# Altium PCB imu_cpu.PcbDoc
Units mil, origin at the board's own origin, x right, y up, seen from the top; angles counter-clockwise.
Board outline 2000 x 2000 mil, 2 copper layers (Top Layer, Bottom Layer); 86 components, 67 nets, 314 pads, 99 vias.
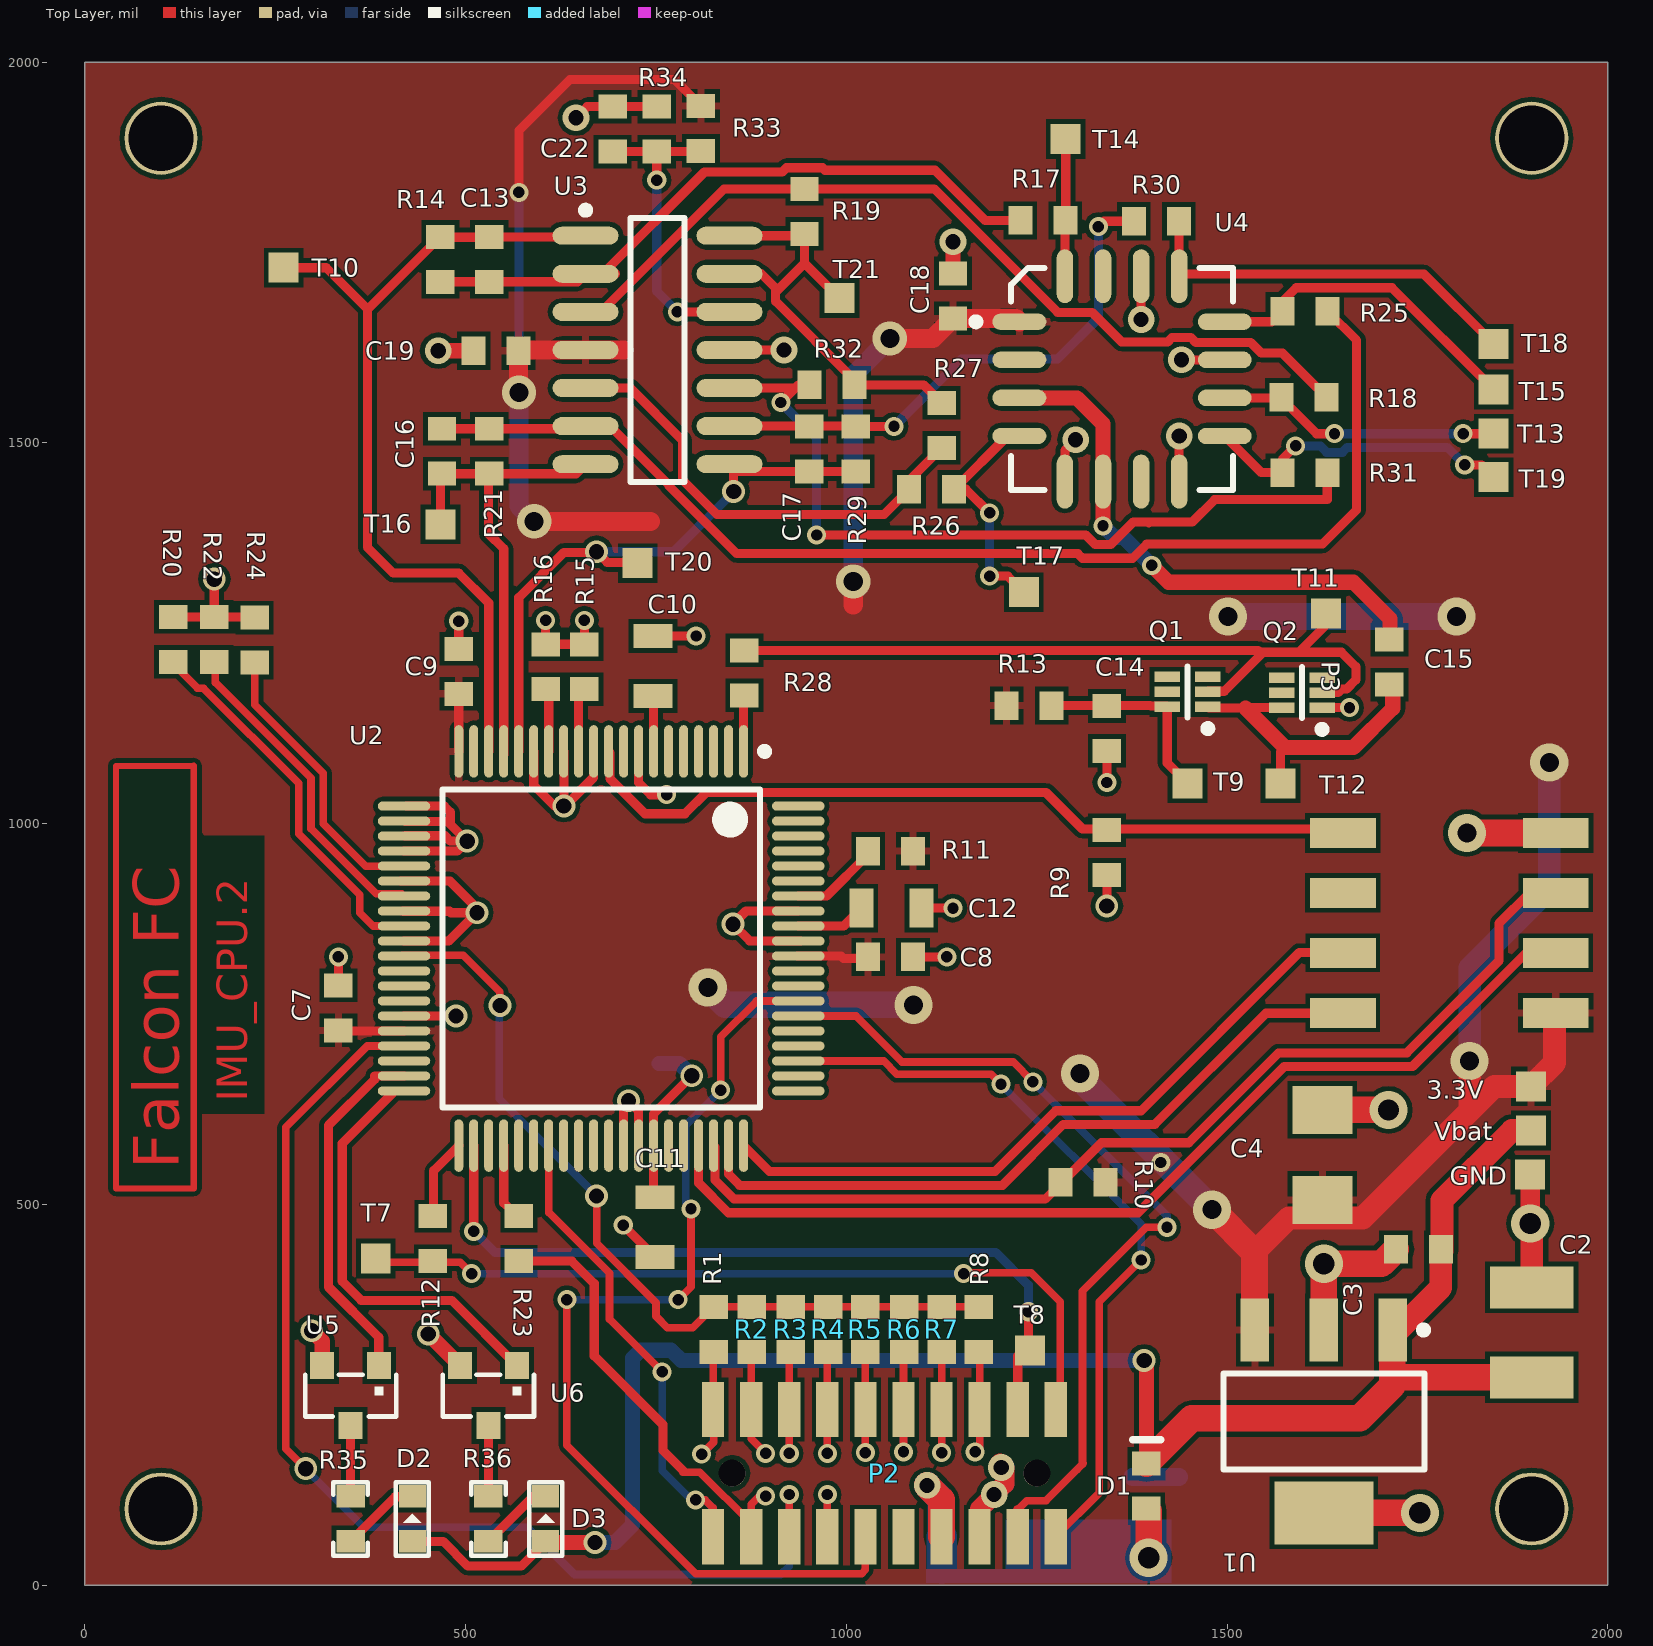
[diagram p0: Top Layer view]
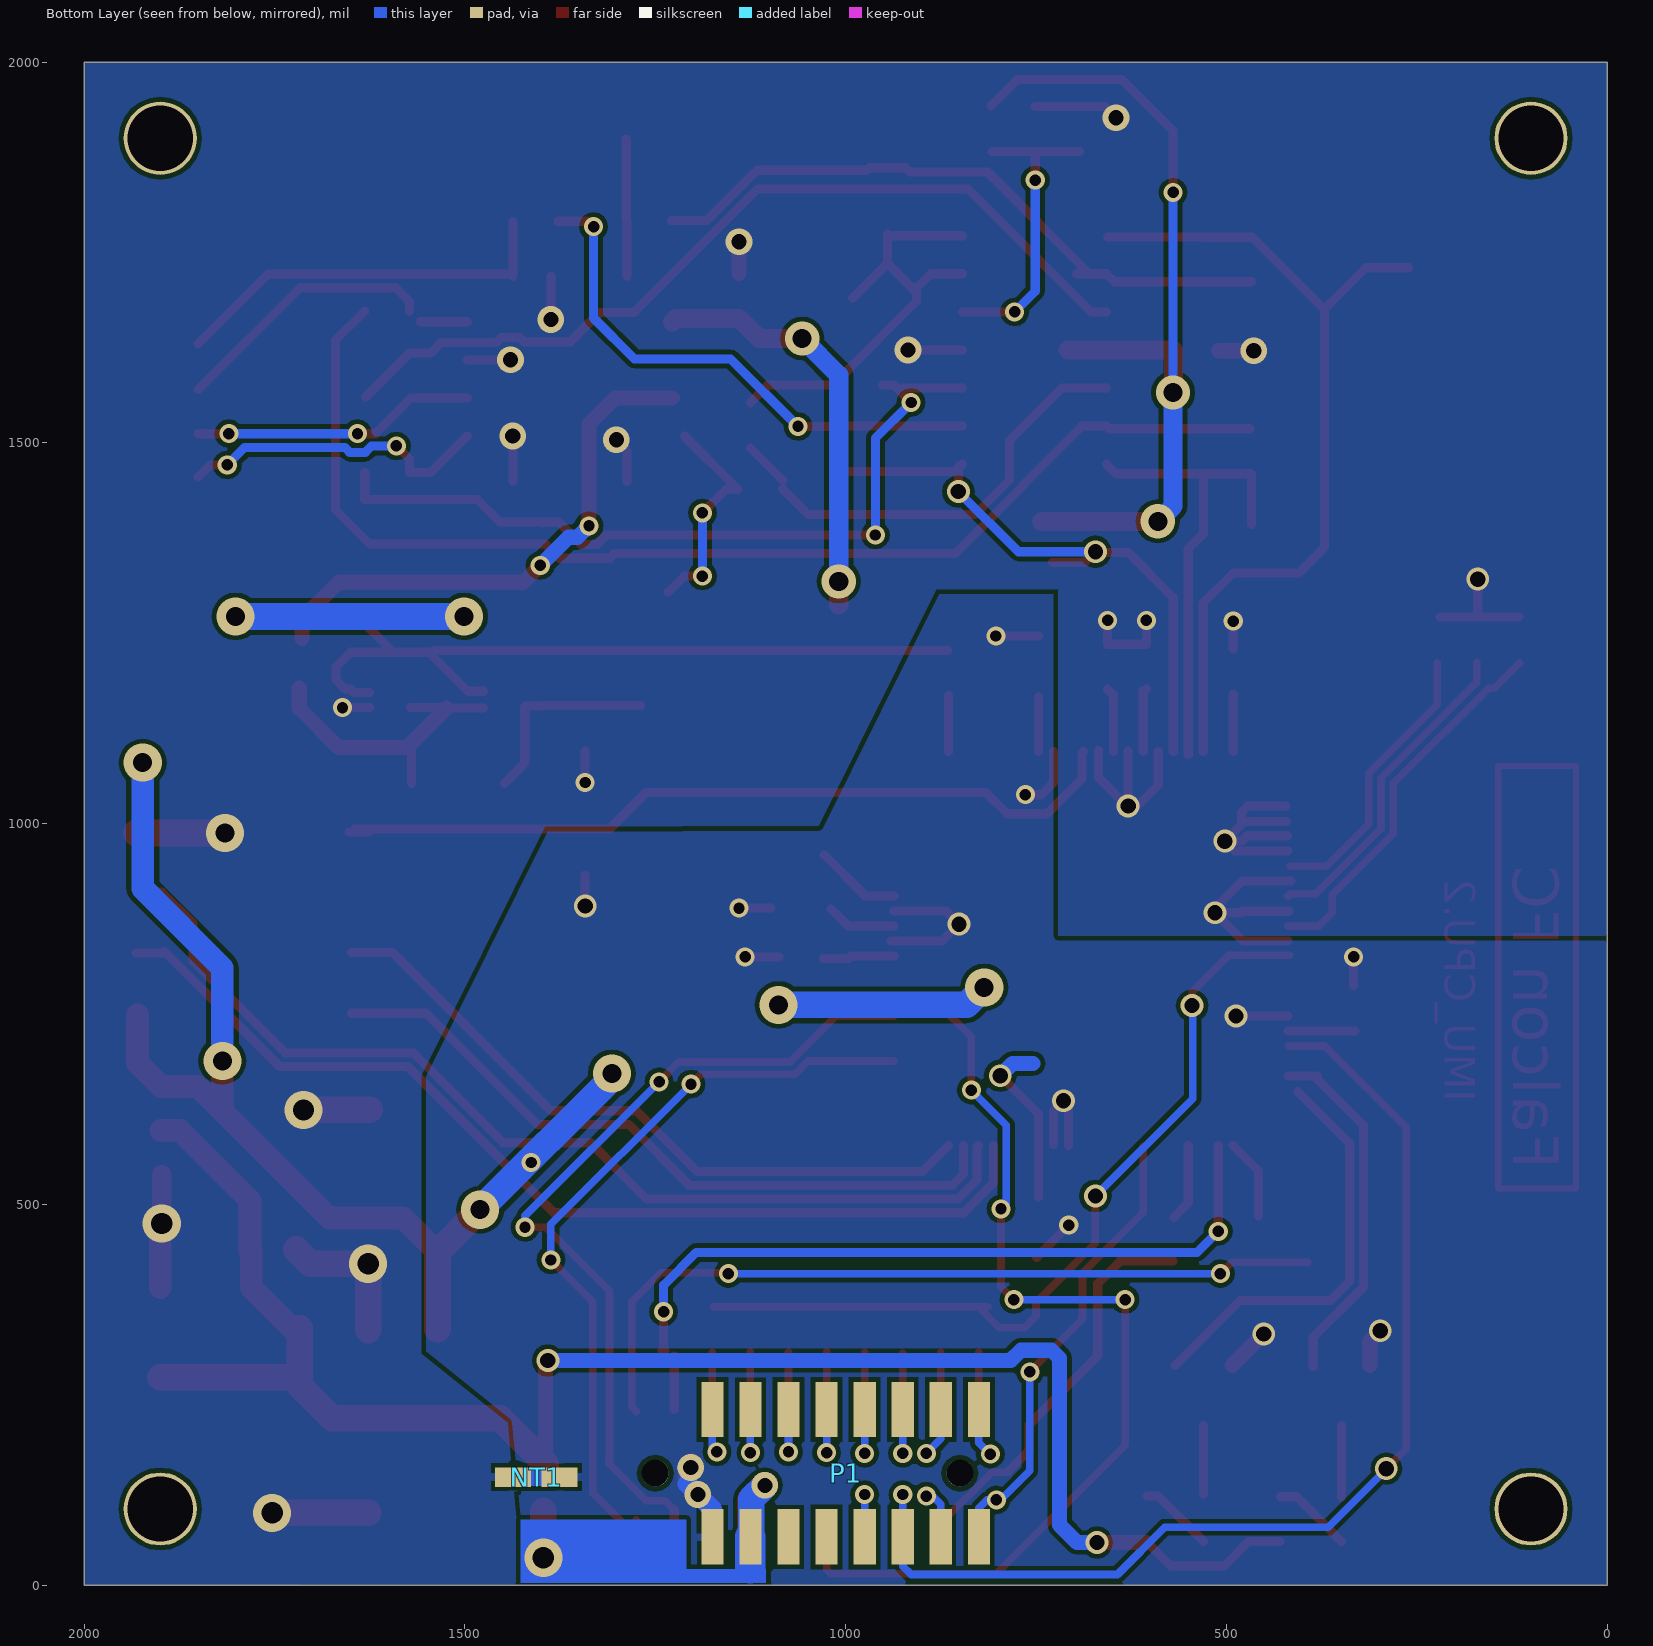
[diagram p1: Bottom Layer view, seen from below]

## Layer stack, top to bottom
Top Layer: signal copper 1.4
Dielectric: dielectric 12.6, FR-4, Dk 4.8
Bottom Layer: signal copper 1.4

## Board outline
0,0 2000,0 2000,2000 0,2000

## Design rules (kind name [scope] priority, off if disabled: settings)
Clearance [All] p1: gap=6
ComponentClearance [All] p1: gap=5 collisioncheckmode=3 verticalgap=1 showdistances=FALSE
DiffPairsRouting [All] p1: maxlimit=10 minlimit=6 mostfreqgap=6 maxuncoupledlength=500
HoleSize [All] p1: absolutevalues=TRUE maxlimit=100 minlimit=15 maxpercent=80.000 minpercent=20.000
HoleToHoleClearance [All] p1: gap=6 allowstackedmicrovias=TRUE
PlaneConnect [All] p1: planeconnectstyle=Direct reliefexpansion=20 reliefentries=4 reliefconductorwidth=25 reliefairgap=10
PolygonConnect PolygonConnect_1 [IsVia] p1: connectstyle=Direct reliefconductorwidth=10 reliefentries=4 polygonreliefangle="90 Angle"
PolygonConnect [All] p2: connectstyle=Relief reliefconductorwidth=10 reliefentries=4 polygonreliefangle="90 Angle"
RoomDefinition imu_cpu [InComponentClass('imu_cpu')] p1: confinementstyle=ConfineIn formatcopy=TRUE lockcomponents=FALSE outline 0,0 2000,0 2000,2000 0,2000
RoutingVias [All] p1: holewidth=15 width=25 viastyle="Through Hole" minholewidth=15 minwidth=25 maxholewidth=100 maxwidth=200
SilkToSilkClearance [All] p1: silktosilkclearance=1
SilkscreenOverComponentPads [All] p1: minsilkscreentomaskgap=1
SolderMaskExpansion SolderMaskExpansion_1 [IsVia] p1: expansion=-300
SolderMaskExpansion [All] p2: expansion=4
Width [All] p1: maxlimit=100 minlimit=6 preferedwidth=6
21 further rules are at their usual default settings.

## Components (designator, comment, footprint, x,y, rotation, side; value= is the part's Value field where it differs from the comment)
3.3V "TEST_PAD" TEST_PAD 1899,655 r0 top (schematic designator T5)
C2 "" "1210 (3225)" 1900,332 r90 top
C3 "" "0603 (1608)" 1751,441 r180 top
C4 "" "1206 (3216)" 1625,565 r90 top
C7 "Capacitor" "0603 (1608)" 333,758 r270 top
C8 "Capacitor" "0603 (1608)" 1058,825 r180 top
C9 "Capacitor" "0603 (1608)" 491,1200 r270 top
C10 "1.5uF" "0805 (2012)" 746,1207 r270 top
C11 "1.5uF" "0805 (2012)" 749,470 r90 top
C12 "1.5uF" "0805 (2012)" 1059,889 r180 top
C13 "1nF" "0603 (1608)" 531,1741 r90 top
C14 "1uF" "0603 (1608)" 1342,1125 r90 top
C15 "Capacitor" "0603 (1608)" 1713,1212 r270 top
C16 "1nF" "0603 (1608)" 469,1489 r270 top
C17 "1nF" "0603 (1608)" 951,1492 r270 top
C18 "Capacitor" "0603 (1608)" 1140,1693 r90 top
C19 "Capacitor" "0603 (1608)" 540,1621 r180 top
C22 "Capacitor" "0603 (1608)" 693,1912 r90 top
D1 "Diode" "0603(1608) diode - line on pin2" 1394,130 r90 top
D2 "LED" "LED 0603 (1608)" 430,87 r180 top
D3 "LED" "LED 0603 (1608)" 605,87 r180 top
GND "TEST_PAD" TEST_PAD 1898,539 r0 top
NT1 "Net Tie" NET_TIE 1406,142 r180 bottom net-tie
P1 "2x8smd0.5female" "Header, right hole" 1000,147 r0 bottom locked
P2 "MHDR2X10" S9013E-10-ND 1050,147 r0 top locked
P3 "Header 4X2" "right-angle female header 8-pin" 1652,751.52 r90 top
Q1 "MOSFET N CH" SOT563F 1448,1173 r180 top
Q2 "MOSFET P CH" SOT563F 1598,1172 r180 top
R1 "SS Jumper" "0603 (1608)" 826,336 r90 top
R2 "SS Jumper" "0603 (1608)" 876,336 r90 top
R3 "SS Jumper" "0603 (1608)" 927,336 r90 top
R4 "SS Jumper" "0603 (1608)" 976,336 r90 top
R5 "SS Jumper" "0603 (1608)" 1025,336 r90 top
R6 "SS Jumper" "0603 (1608)" 1076,336 r90 top
R7 "SS Jumper" "0603 (1608)" 1125,336 r90 top
R8 "SS Jumper" "0603 (1608)" 1174,336 r90 top
R9 "Res1" "0603 (1608)" 1342,962 r90 top
R10 "Res1" "0603 (1608)" 1311,529 r0 top
R11 "Res1" "0603 (1608)" 1058,964 r0 top
R12 "931 1%" "0603 (1608)" 457,455 r270 top
R13 "200" "0603 (1608)" 1240,1155 r0 top
R14 "499K 1%" "0603 (1608)" 467,1741 r90 top
R15 "1K" "0603 (1608)" 656,1206 r270 top
R16 "1K" "0603 (1608)" 605,1206 r270 top
R17 "Res1" "0603 (1608)" 1258,1792 r180 top
R18 "Res1" "0603 (1608)" 1601,1560 r0 top
R19 "499K 1%" "0603 (1608)" 945,1804 r90 top
R20 "1K" "0603 (1608)" 116,1242 r270 top
R21 "499K 1%" "0603 (1608)" 531,1489 r270 top
R22 "1K" "0603 (1608)" 170,1242 r270 top
R23 "931 1%" "0603 (1608)" 570,455 r270 top
R24 "1K" "0603 (1608)" 223,1241 r270 top
R25 "Res1" "0603 (1608)" 1602,1673 r0 top
R26 "Res1" "0603 (1608)" 1112,1439 r180 top
R27 "499K 1%" "0603 (1608)" 1125,1523 r270 top
R28 "931 1%" "0603 (1608)" 866,1198 r270 top
R29 "499K 1%" "0603 (1608)" 1012,1492 r270 top
R30 "Res1" "0603 (1608)" 1407,1791 r180 top
R31 "Res1" "0603 (1608)" 1602,1461 r0 top
R32 "499K 1%" "0603 (1608)" 981,1576 r180 top
R33 "Res1" "0603 (1608)" 809,1913 r90 top
R34 "Res1" "0603 (1608)" 751,1912 r270 top
R35 "Resistor" "0603 (1608) BRACKET" 349,87 r90 top
R36 "Resistor" "0603 (1608) BRACKET" 530,87 r90 top
T7 "" TEST_PAD 382,429 r0 top
T8 "" TEST_PAD 1241,308 r0 top
T9 "" TEST_PAD 1448,1053 r0 top
T10 "" TEST_PAD 261,1730 r90 top
T11 "" TEST_PAD 1630,1276 r90 top
T12 "" TEST_PAD 1570,1053 r90 top
T13 "" TEST_PAD 1850,1512 r90 top
T14 "" TEST_PAD 1288,1899 r90 top
T15 "" TEST_PAD 1850,1570 r90 top
T16 "" TEST_PAD 467,1393 r90 top
T17 "" TEST_PAD 1233,1304 r90 top
T18 "" TEST_PAD 1850,1630 r90 top
T19 "" TEST_PAD 1850,1455 r90 top
T20 "" TEST_PAD 726,1342 r90 top
T21 "" TEST_PAD 991,1690 r90 top
U1 "3.3V Linear 500mA Regulator" "SOT233 (Ti voltage reg)" 1627,215 r270 top
U2 "TMS320F28035" TS-PQFP-G80 678,836 r270 top
U3 "LMV324M" M14A_N 752,1622 r0 top
U4 "HMC1053" LCC-16 1362,1584 r0 top
U5 "RK7002B" SOT-23-RK7002B 349,249 r180 top
U6 "RK7002B" SOT-23-RK7002B 530,249 r180 top
Vbat "TEST_PAD" TEST_PAD 1899,597 r0 top (schematic designator T4)

## Footprints (in the part's own frame and the unit in brackets; to place one, negate y for a bottom-side part, rotate by r counter-clockwise, add the part's x,y. Pads: shape width x height; smd on the part's side, far side on the other; paste and mask are expansions set on the pad)
"0603 (1608)" [mm] "Chip 2-Leads 0603 (1608)"
  rect 0.8x0.95 smd mask+0: 1(-0.75,0) 2(0.75,0)
  body extent -0.77,-0.43 0.77,0.43, height 0.55
"0603 (1608) BRACKET" [mm] "Chip 2-Leads 0603 Bracket (1608)"
  rect 0.75x0.95 smd mask+0: 1(-0.75,0) 2(0.75,0)
  silkscreen extent -1.22,-0.58 1.22,0.58, body extent -0.77,-0.43 0.77,0.43, height 0.55
"0603(1608) diode - line on pin2" [mm]
  rect 0.8x0.95 smd mask+0: 1(-0.75,0) 2(0.75,0)
  silkscreen extent 1.55,-0.48 1.55,0.45, body extent -0.77,-0.43 0.77,0.43, height 0.55
"0805 (2012)" [mm] "Chip 2-Leads, IPC Medium Density (2012)"
  rect 0.8x1.3 smd mask+0: 1(-1,0) 2(1,0)
  body extent -1.05,-0.63 1.05,0.63, height 0.5
"1206 (3216)" [mm] "Chip 2-Leads 1206 Body 3.2x2.1mm (3216)"
  rect 1.6x2 smd mask+0.051: 1(-1.5,0) 2(1.5,0)
  body extent -1.6,-0.85 1.6,0.85, height 1.72
"1210 (3225)" [mm] "Chip  2-Leads 1210 Body 3.2x2.5mm Rectangular Silk Screen (3225)"
  rect 1.4x2.8 smd mask+0: 1(-1.5,0) 2(1.5,0)
  body extent -1.6,-1.24 1.6,1.26, height 2.5
"Header, right hole" [mm]
  rect 0.74x1.85 smd: 1(-4.445,2.125) 2(-4.445,-2.125) 3(-3.175,2.125) 4(-3.175,-2.125) 5(-1.905,2.125) 6(-1.905,-2.125) 7(-0.635,2.125) 8(-0.635,-2.125) 9(0.635,2.125) 10(0.635,-2.125) 11(1.905,2.125) 12(1.905,-2.125) 13(3.175,2.125) 14(3.175,-2.125) 15(4.445,2.125) 16(4.445,-2.125)
LCC-16 [mm] "HCM1053"
  oval 1.8x0.55 smd: 1(-3.425,1.905) 2(-3.425,0.635) 3(-3.425,-0.635) 4(-3.425,-1.905) 9(3.425,-1.905) 10(3.425,-0.635) 11(3.425,0.635) 12(3.425,1.905)
  oval 0.55x1.8 smd: 5(-1.905,-3.425) 6(-0.635,-3.425) 7(0.635,-3.425) 8(1.905,-3.425) 13(1.905,3.425) 14(0.635,3.425) 15(-0.635,3.425) 16(-1.905,3.425)
  silkscreen extent -5,-3.7 3.7,3.7, body extent -3.68,-3.69 3.69,3.68, height 2.8
"LED 0603 (1608)" [mm] "LED Chip 2-Leads 0603 Rectangular Silk Screen (1608)"
  rect 0.9x0.75 smd mask+0: 1(0,0.75) 2(0,-0.75)
  silkscreen extent -0.55,-1.22 0.55,1.22
M14A_N [mm] "SOIC, 14-Leads, Body 8.6x3.9mm, Pitch 1.27mm, IPC Medium Density"
  oval 2.2x0.6 smd: 1(-2.4,3.81) 2(-2.4,2.54) 3(-2.4,1.27) 4(-2.4,0) 5(-2.4,-1.27) 6(-2.4,-2.54) 7(-2.4,-3.81) 8(2.4,-3.81) 9(2.4,-2.54) 10(2.4,-1.27) 11(2.4,0) 12(2.4,1.27) 13(2.4,2.54) 14(2.4,3.81)
  silkscreen extent -2.52,-4.4 0.9,4.78, body extent -2,-4.38 2,4.38, height 1.75
NET_TIE [mm] "Used to connect 2 nets"
  rect 1.2x0.65 smd paste+0 mask-300: 1(-0.775,0)
  rect 1.2x0.65 smd: 2(0.775,0)
  Top Layer lines w0.6: 0.775,0 -0.775,0
"right-angle female header 8-pin" [mm] "Part No. 3M9279CT-ND ,Used for JTAG connection for IMU"
  rect 1x2.2 smd: 1(0,0) 2(2,0) 3(4,0) 4(6,0) 5(0,-7.1) 6(2,-7.1) 7(4,-7.1) 8(6,-7.1)
S9013E-10-ND [mm] "20-POS Header SMD"
  round 0.889 hole 0.9 unplated: 0(-5.08,0)
  round 0.889 hole 0.9 unplated mask+0: 0(5.08,0)
  rect 0.74x1.85 smd: 1(-5.715,2.125) 2(-5.715,-2.125) 3(-4.445,2.125) 4(-4.445,-2.125) 5(-3.175,2.125) 6(-3.175,-2.125) 7(-1.905,2.125) 8(-1.905,-2.125) 9(-0.635,2.125) 10(-0.635,-2.125) 11(0.635,2.125) 12(0.635,-2.125) 13(1.905,2.125) 14(1.905,-2.125) 15(3.175,2.125) 16(3.175,-2.125) 17(4.445,2.125) 18(4.445,-2.125) 19(5.715,2.125) 20(5.715,-2.125)
"SOT233 (Ti voltage reg)" [mm] "SOT223, 4-Leads, Body 6.7x7.3mm (max), Pitch 2.30mm, IPC Medium Density"
  rect 2.1x0.95 smd: 1(-3.05,2.3) 2(-3.05,0) 3(-3.05,-2.3)
  rect 2.1x3.3 smd: 4(3.05,0)
  silkscreen extent -3.17,-3.35 1.6,3.45, body extent -1.85,-3.35 1.85,3.35, height 1.8
SOT563F [mm] "SOT23, 6-Leads, Body 1.7x1.7mm (max), Pitch 0.50mm, IPC Medium Density"
  rect 0.85x0.35 smd: 1(-0.675,0.5) 3(-0.675,-0.5) 4(0.675,-0.5) 6(0.675,0.5)
  rect 0.85x0.343 smd: 2(-0.675,0) 5(0.675,0)
  silkscreen extent -0.8,-0.85 0,1.35, body extent -0.6,-0.85 0.6,0.85, height 0.6
SOT-23-RK7002B [mm] "SOT-23; 3 Leads; Body 3.0 x 2.6 mm, inc. leads (LxW max)"
  rect 0.8x0.9 smd paste-0.025 mask+0: 1(0.95,-1) 2(-0.95,-1) 3(0,1)
  silkscreen extent -1.52,-0.7 1.52,0.7, body extent -1.5,-1.25 1.5,1.25, height 1.1
TEST_PAD [mm]
  rect 1x1 smd: 0(0,0)
TS-PQFP-G80 [mm] "TMS320F28035 (80-pin)"
  oval 1.75x0.3 smd: 1(-6.575,4.75) 2(-6.575,4.25) 3(-6.575,3.75) 4(-6.575,3.25) 5(-6.575,2.75) 6(-6.575,2.25) 7(-6.575,1.75) 8(-6.575,1.25) 9(-6.575,0.75) 10(-6.575,0.25) 11(-6.575,-0.25) 12(-6.575,-0.75) 13(-6.575,-1.25) 14(-6.575,-1.75) 15(-6.575,-2.25) 16(-6.575,-2.75) 17(-6.575,-3.25) 18(-6.575,-3.75) 19(-6.575,-4.25) 20(-6.575,-4.75) 41(6.575,-4.75) 42(6.575,-4.25) 43(6.575,-3.75) 44(6.575,-3.25) 45(6.575,-2.75) 46(6.575,-2.25) 47(6.575,-1.75) 48(6.575,-1.25) 49(6.575,-0.75) 50(6.575,-0.25) 51(6.575,0.25) 52(6.575,0.75) 53(6.575,1.25) 54(6.575,1.75) 55(6.575,2.25) 56(6.575,2.75) 57(6.575,3.25) 58(6.575,3.75) 59(6.575,4.25) 60(6.575,4.75)
  oval 0.3x1.75 smd: 21(-4.75,-6.575) 22(-4.25,-6.575) 23(-3.75,-6.575) 24(-3.25,-6.575) 25(-2.75,-6.575) 26(-2.25,-6.575) 27(-1.75,-6.575) 28(-1.25,-6.575) 29(-0.75,-6.575) 30(-0.25,-6.575) 31(0.25,-6.575) 32(0.75,-6.575) 33(1.25,-6.575) 34(1.75,-6.575) 35(2.25,-6.575) 36(2.75,-6.575) 37(3.25,-6.575) 38(3.75,-6.575) 39(4.25,-6.575) 40(4.75,-6.575) 61(4.75,6.575) 62(4.25,6.575) 63(3.75,6.575) 64(3.25,6.575) 65(2.75,6.575) 66(2.25,6.575) 67(1.75,6.575) 68(1.25,6.575) 69(0.75,6.575) 70(0.25,6.575) 71(-0.25,6.575) 72(-0.75,6.575) 73(-1.25,6.575) 74(-1.75,6.575) 75(-2.25,6.575) 76(-2.75,6.575) 77(-3.25,6.575) 78(-3.75,6.575) 79(-4.25,6.575) 80(-4.75,6.575)
  silkscreen extent -6.7,-5.3 5.3,5.58, body extent -6,-6 6,6, height 1.6

## Part data
C2 C3 C4 C10 C11 C12 C13 C14 C16 C17: library part Capacitor
D1: "Reverse voltage protection diode"
NT1: library part NET_TIE
P2: "Header, 10-Pin, Dual row, Male"
P3: "Header, 4-Pin, Dual row"
Q1 Q2: library part MOSFETs
R1 R2 R3 R4 R5 R6 R7 R8 R12 R13 R14 R15 R16 R19 R20 R21 R22 R23 R24 R27 R28 R29 R32: library part Res1, "Resistor"
R9 R10 R11 R17 R18 R25 R26 R30 R31 R33 R34: "Resistor"
T7 T8 T9 T10 T11 T12 T13 T14 T15 T16 T17 T18 T19 T20 T21: library part TEST_PAD
U2: library part "TMS320F28035 (80-pin)", "80-pin"
U3: "General Purpose, Low Voltage, Rail-to-Rail Output Operational Amplifiers"

## Free pads (board coordinates)
  round 96 hole 86: 0(100,100) 1(1900,100) 2(1900,1900) 3(100,1900)

## Via types
v1: diameter 25, hole 15, Top Layer to Bottom Layer, tented both sides, 48 vias
v2: diameter 30, hole 20, Top Layer to Bottom Layer, tented both sides, 18 vias
v3: diameter 35, hole 20, Top Layer to Bottom Layer, tented both sides, 11 vias
v4: diameter 50, hole 28, Top Layer to Bottom Layer, tented both sides, 5 vias
v5: diameter 50, hole 25, Top Layer to Bottom Layer, tented both sides, 5 vias
v6: diameter 25, hole 15, Top Layer to Bottom Layer, 4 vias
v7: diameter 45, hole 25, Top Layer to Bottom Layer, tented both sides, 4 vias
v8: diameter 50, hole 25, Top Layer to Bottom Layer, 4 vias

## Nets (pads, with @x,y where several pads share a name; then routed paths per layer and width w, separated by ;. In a path a pad name is that pad's centre, name@x,y a point inside that pad or via, vN(x,y) a via of type N, cw(c..) or ccw(c..) an arc to the next point about the centre after c; other vN are vias at no path point)
3.3V: 3.3V.0 C4.1 C7.2 C8.2 C9.2 C18.1 C19.1 P3.5 R10.2 R11.2 R13.1 R33.2 U1.3 U2.20 U2.36 U2.70 U3.4 U4.1 | length 4054
  Top Layer w12: C7.2@331.27,727.73 U2.36 ; U2.20 C9.2@490.99,1169.99 ; v1(570,1829) 570,1910 637,1977 774.53,1977 R33.2 ; U2.70@936,826 993,826 996,823 C8.2@1029,823 ; v6(1413,555) 1410,555 v6@1415,560
  Top Layer w25: C19.1 569.53,1566.47 v7(570,1566) ; C19.1@570.53,1622 U3.4 708,1622 ; v7(590,1397) 743,1397 ; 1009,1287 v7(1009,1318) ; v7(1057,1637) 1113.53,1637 C18.1 1222.69,1663.47 U4.1
  Top Layer w30: 1536,437 1581,482 1678,482 1818.5,622.5 ; v5(1818.5,688.5) 1818.5,622.5 ; P3.5@1930,749 1930,686 3.3V.0 1851,655 1818.5,622.5
  Top Layer w35: v8@1088,756 v8(1088,762) ; v5(1480,493) 1536,437 U1.3@1536,336
  Bottom Layer w12: v7(570,1566) v1(570,1829)
  Bottom Layer w25: v7(570,1566) 570,1417 v7(590,1397) ; v7(1009,1318) 1009,1589 v7(1057,1637)
  Bottom Layer w30: v5(1818.5,688.5) 1818.5,810.5 1923,915 v5(1923,1080)
  Bottom Layer w35: v8(818,785) 841,762 v8(1088,762) ; v5(1307,672) 1301,672 v5(1480,493) ; v8(1501,1272) v8(1801,1272)
ADC_DRDY: P2.18 U2.66 | length 1146.9
  Top Layer w10: U2.66 1012.58,747.42 1073,687 1219,687 v1(1245,661) ; P2.18@1225,99 1237,111 1262.08,111 1303,151.92 ; 1302,151 1310,159 ; 1311,160 1310,159 ; v1(1421,470) 1394,470 1310,386 1310,159
  Top Layer w12: P2.18@1225,81.29 P2.18 P2.18@1225,99
  Bottom Layer w10: v1(1245,661) 1421,485 v1(1421,470)
ADC_SYNC: P2.20 U2.63 | length 1019.4
  Top Layer w10: U2.63 1049.01,688.36 1066.37,671 1190,671 v1(1203,658) ; P2.20@1274,63 P2.20@1275,64 ; P2.20 P2.20@1275,64 ; P2.20@1275,86 P2.20@1275,64 ; v1(1387,427) 1332,372 1332,121 P2.20@1275,64
  Bottom Layer w10: v1(1203,658) 1387,474 v1(1387,427)
AGND: C2.2 C3.2 C4.2 C9.1 C14.1 C18.2 C19.2 C22.2 GND.0 NT1.1 P3.8 Q2.1 R15.1 R16.1 R20.1 R22.1 R24.1 R34.1 U1.2 U1.4 U2.11 U2.13 U2.15 U2.21 U2.22 U2.23 U2.24 U2.26 U2.28 U2.30 U3.11 U4.5 U4.8 U4.11 U4.14 | length 2478
  Top Layer w12: R20.1 R22.1 ; v2(170,1321) R22.1 ; R24.1@219.47,1271.53 R22.1 ; U2.26@415,924.68 479.32,924.68 515,889 v2(515,883) ; U2.28@418,885 479,885 481,883 v2(515,883) ; U2.30 477.84,845.84 v2(515,883) ; U2.24 488.95,963.95 v2(502,977) ; U2.23@420,984 473,984 480,977 v2(502,977) ; U2.22@421,1003 476,1003 480,999 ; U2.21@422,1023 472,1023 480,1015 480,999 ; C9.1 v1(491,1266) ; U2.15 589.42,1050.58 617,1023 v2(629,1023) ; v1(605,1267) R16.1 R15.1 v1(656,1267) ; U2.13@629,1095 v2(629,1023) ; v3(645,1927) 659.53,1941.53 C22.2 R34.1 ; U2.11@668,1096 668,1060.52 630.48,1023 v2(629,1023) ; U3.11 v3(918,1622) ; U4.5 1287,1490 v3(1301,1504) ; v1(1342,1054) C14.1 ; v3(1387,1662) U4.14 ; U4.8 v3(1437,1509) ; v3(1440,1609) U4.11 ; Q2.1 v1(1660.68,1152.32) ; 480,999 v2(502,977)
  Top Layer w20: v3(464,1621) C19.2 ; C18.2 v3(1140,1764)
  Top Layer w25: v4(1898,475) GND.0
  Top Layer w30: C2.2 v4@1900,472
  Top Layer w35: C4.2 v4(1711.94,624.06) ; U1.4 v4(1753.08,94.92) ; U1.2 v4(1627,422) ; v4@1629,422 1702.47,422 C3.2 ; v5(1814.74,987.74) P3.8
CLK_A: P2.19 R12.2 T7.0 | length 1057.9
  Top Layer w10: T7.0@393,424 493,424 v1(508,409) ; v1(1154,409) 1155,410 1243,410 1281,372 1281,369 ; P2.19@1275,228 1281,234 1281,369 ; 1281,370 1281,369
  Bottom Layer w10: v1(508,409) v1(1154,409)
DGND: C7.1 C8.1 C10.1 C11.1 C12.1 NT1.2 P1.15 P2.16 R9.1 U2.8 U2.35 U2.52 U2.53 U2.71 U2.73 U5.1 U6.1 | length 1106
  Top Layer w12: C7.1 v1(333,825) ; U2.35 v2(487.42,747.42) ; v6(707,472.63) C11.1 ; U2.52 707.53,635.47 708.06,636 v2(714,636) 727,623 U2.53@727,579 ; U2.8@727.21,1066.21 U2.8 727.21,1053.79 743,1038 v6(764,1038) ; C10.1 v1(802.63,1246.37) ; U2.73 868.21,885.21 v2(851,868) 873,846 U2.71@940,846 ; C8.1 v1(1132,825) ; C12.1 v1(1140,889) ; v2(1342,892) R9.1
  Top Layer w20: v2(298,334) 311.6,320.4 U5.1 ; v2(451,329.97) U6.1
  Top Layer w25: P2.16 1175,100 v3(1194,119) 1208,133 1208,154 1201.92,160.08 1199.92,158.08 v3(1203.46,154.54)
  Bottom Layer w25: P1.15 1175,100 v3(1194,119) 1208,133 ; v3(1203.46,154.54) 1203.46,158 1204,158 1208,154 v3@1208,156.22
EN_SIG: P1.7 P2.8 | length 111.3
  Top Layer w10: P2.8 v1(975,119)
  Bottom Layer w10: P1.7 v1(975,119)
LED0: U2.39 U5.2 | length 472.6
  Top Layer w12: U5.2@386,287 386,325.54 320,391.54 320,603.72 380.68,664.39 380.68,668.68 U2.39
LED1: U2.40 U6.2 | length 552.4
  Top Layer w12: U2.40@406,648 338,580 338,399 363,374 481.77,374 U6.2
MAG_S/R: Q1.2 Q2.2 R28.1 T11.0 | length 1038.8
  Top Layer w12: R28.1 1540.47,1227.53 1544,1224 ; Q1.2@1475.37,1173.8 1496.28,1173.8 1547.48,1225 1594,1225 ; Q2.2@1625,1172 1645.72,1172 1650.54,1176.82 1656.82,1176.82 1669,1189 1669,1206 1650,1225 1594,1225 ; T11.0@1630,1273 1630,1261 1594,1225 ; T11.0 T11.0@1634,1272
MISO: P1.3 P2.4 R23.2 | length 662.2
  Top Layer w10: 785.5,148.5 807.5,148.5 P2.4@875,81 ; P2.4 P2.4@875,81 ; v1(894,117) 890,121 875,106 P2.4@875,81
  Top Layer w12: R23.2 639.53,425.47 669,396 669,301 759,211 759,177 786,150
  Bottom Layer w10: P1.3 875,106 890,121 v1(894,117)
MISO_A: P2.17 T8.0 U2.42 | length 1029.6
  Top Layer w12: v1(510.68,464.68) U2.42 ; P2.17 T8.0@1225,301 ; T8.0@1237,308 1239,310 v1(1239,359) ; T8.0@1240,307 T8.0
  Bottom Layer w12: v1(510.68,464.68) 538.35,437 581,437 ; 580,437 581,437 ; v1(1239,359) 1239,394 1196,437 581,437
MOSI: P1.1 P2.2 U2.47 | length 653.8
  Top Layer w10: U2.47@609,576 609,489.37 689,409.37 689,349 v1(758,280) ; v1@814.29,112 825,101.29 P2.2
  Bottom Layer w10: v1(758,280) 758,150 796,112 v1(802,112) ; v1@814,112 825,101 P1.1
NetC10_2: C10.2 U2.7 | length 71.2
  Top Layer w12: U2.7 C10.2@746.9,1166.1
NetC11_2: C11.2 U2.54 | length 229.3
  Top Layer w12: C11.2@746.9,510.1 U2.54 746.9,618.9 v2(797,669)
  Bottom Layer w20: 754,685 781,685 v2(797,669)
NetC12_2: C12.2 U2.72 | length 91.5
  Top Layer w12: U2.72 996.53,865.53 C12.2@1019,888
NetC13_1: C13.1 R14.1 R17.2 U3.2 | length 869.2
  Top Layer w12: R14.1 C13.1 646.98,1711.47 U3.2 U3.2@680,1722 ; U3.2@697,1722 U3.2@680,1722 ; R17.2 1182.41,1792 1116.41,1858 971.95,1858 968.67,1861.28 921.33,1861.28 915.78,1855.72 813.72,1855.72 U3.2@680,1722
NetC13_2: C13.2 R14.2 T10.0 U2.18 U3.1 | length 1156.3
  Top Layer w12: T10.0 317,1730 371,1676 ; 371,1420 371,1425 ; C13.2@529,1770 466,1770 371,1675 371,1425 ; U2.18 530.36,1289.64 491,1329 405,1329 371,1363 371,1425 ; C13.2 U3.1@656.04,1770.53
NetC14_2: C14.2 Q1.6 R13.2 T9.0 | length 261.5
  Top Layer w12: R13.2 1398.97,1155 ; 1399.72,1154.25 Q1.6@1420.49,1154.25 ; Q1.6 1421.43,1079.57 T9.0
NetC15_1: C15.1 U4.3 U4.6 | length 711.5
  Top Layer w20: U4.3 1303,1559 1337,1525 U4.6 v1(1337,1391) ; v1(1401,1339) 1423,1317 1666,1317 1714,1269 C15.1@1714,1243
  Bottom Layer w20: v1(1337,1391) 1352,1376 1364,1376 v1(1401,1339)
NetC15_2: C15.2 Q1.1 Q2.6 T12.0 | length 406.4
  Top Layer w12: Q1.1@1475.89,1152 1524,1152 ; 1526.75,1149.25 1529.82,1152.32 Q2.6 ; T12.0 1570,1094 1576,1100
  Top Layer w20: 1524,1152 1526.75,1149.25 1576,1100 1666,1100 1717.47,1151.47 C15.2@1717.47,1178
NetC16_1: C16.1 R21.1 R25.2 U3.6 | length 1573.5
  Top Layer w12: C16.1 R21.1 U3.6@654.04,1518.53 ; U3.6 690,1522 767,1445 767,1443.54 856.04,1354.5 1304,1354.5 1310,1348.5 1375.85,1348.5 1394.35,1367 1625,1367 1670,1412 1670,1634.53 R25.2
NetC16_2: C16.2 R21.2 T16.0 U2.17 U3.7 | length 635
  Top Layer w12: T16.0 C16.2@467,1459 ; C16.2 R21.2 644.98,1459.47 U3.7 ; R21.2@530,1458 530,1381 550.05,1360.95 U2.17 ; U2.17@550,1091 U2.17
NetC17_1: C17.1 R29.1 R30.2 U3.9 | length 712.9
  Top Layer w12: U3.9 R29.1@1012,1522 ; R29.1 v1(1062.53,1521.53) ; v1(1331,1784) 1338,1791 R30.2
  Bottom Layer w12: v1(1062.53,1521.53) 1151,1610 1277,1610 1331,1664 v1(1331,1784)
NetC17_2: C17.2 R29.2 T20.0 U2.16 U3.8 | length 807.1
  Top Layer w12: U2.16 569.73,1296.73 629,1356 v2@672,1356 ; v2(672,1357) 686,1343 T20.0@728,1343 ; U3.8 U3.8@852,1466.49 ; U3.8@851,1470 852,1469 U3.8@852,1466.49 ; v2(852,1436) U3.8@852,1466.49 ; U3.8@856.02,1462.47 C17.2 R29.2 ; U3.8@856,1462.49 U3.8@852,1466.49
  Bottom Layer w12: v2(672,1357) 773,1357 v2(852,1436)
NetC22_1: C22.1 R33.1 R34.2 U3.12 | length 405.1
  Top Layer w12: C22.1 R34.2 ; v1(751,1845) R34.2 ; v1(778,1672) U3.12 ; R33.1@808,1882.47 R34.2
  Bottom Layer w12: v1(751,1845) 751,1699 v1(778,1672)
NetD2_2: D2.2 R35.1 | length 104.2
  Top Layer w12: R35.1 407.53,116 D2.2@429,116
NetD3_2: D3.2 R36.1 | length 98.7
  Top Layer w12: R36.1 589.53,117 D3.2@604,117
NetP1_2: P1.2 P2.1 R1.1 | length 204
  Top Layer w10: v1(810,172) 826,188 P2.1@826,229.66 ; P2.1 R1.1@825,305.47
  Bottom Layer w10: v1(810,172) 825,187 P1.2
NetP1_4: P1.4 P2.3 R2.1 | length 205.9
  Top Layer w10: R2.1@875,305.47 P2.3 875,192 v1(894,173)
  Bottom Layer w10: P1.4 875,192 v1(894,173)
NetP1_6: P1.6 P2.5 R3.1 | length 189.1
  Top Layer w10: v1(925,173) P2.5 R3.1@925,304.47
  Bottom Layer w10: v1(925,173) P1.6
NetP1_8: P1.8 P2.7 R4.1 | length 190.1
  Top Layer w10: v1(975,173) P2.7 R4.1@975,305.47
  Bottom Layer w10: v1(975,173) P1.8
NetP1_10: P1.10 P2.9 R5.1 | length 189.1
  Top Layer w10: v1(1025,174) P2.9 R5.1
  Bottom Layer w10: v1(1025,174) P1.10
NetP1_12: P1.12 P2.11 R6.1 | length 186.1
  Top Layer w10: v1(1075,175) P2.11 R6.1@1075,305.47
  Bottom Layer w10: v1(1075,175) P1.12
NetP1_14: P1.14 P2.13 R7.1 | length 189.1
  Top Layer w10: v1(1125,174) P2.13 R7.1
  Bottom Layer w10: v1(1125,174) P1.14
NetP1_16: P1.16 P2.15 R8.1 | length 207.1
  Top Layer w10: v1(1169,175) 1169,179 1171,181 1175,177 P2.15 R8.1@1175,305.47
  Bottom Layer w10: v1(1169,175) 1169,179 1171,181 1175,177 P1.16
NetR11_1: R11.1 U2.74 | length 113.6
  Top Layer w12: U2.74 973.9,904.9 R11.1@1028,959
NetR12_1: R12.1 U2.41 | length 105.8
  Top Layer w12: R12.1@458,485 458,544.15 U2.41
NetR15_2: R15.2 U2.12 | length 85.3
  Top Layer w12: U2.12 R15.2@648.47,1168.95 ; R15.2@648.47,1169.47 R15.2@648.47,1168.95 ; R15.2 R15.2@648.47,1168.95
NetR16_2: R16.2 U2.14 | length 85.8
  Top Layer w12: R16.2 R16.2@609.1,1172.37 ; U2.14 R16.2@609.1,1172.37 ; R16.2@609.1,1174.9 R16.2@609.1,1172.37
NetR17_1: R17.1 T14.0 U4.16 | length 179.2
  Top Layer w12: U4.16 R17.1@1287,1791.47 ; R17.1@1288,1792.47 T14.0
NetR18_1: R18.1 T13.0 U4.10 | length 372.6
  Top Layer w12: U4.10 1570.47,1559 1617.47,1512 v1(1641,1512) ; v1(1810,1512) T13.0
  Bottom Layer w12: v1(1641,1512) v1(1810,1512)
NetR18_2: R18.2 R19.2 U3.3 | length 1158.2
  Top Layer w12: U3.3 678,1672 839.53,1833.53 R19.2 1115.43,1833.53 1277.54,1671.41 1322.59,1671.41 1361.5,1632.5 1421.78,1632.5 1427.78,1638.5 1452.22,1638.5 1458.89,1631.83 1530.9,1631.83 1544.73,1618 1572.53,1618 R18.2
NetR20_2: R20.2 U2.29 | length 499.8
  Top Layer w10: R20.2@115,1211 148,1178 155.75,1178 281,1052.75 281,986.75 361,906.75 361,883 378.47,865.53 U2.29
NetR22_2: R22.2 U2.27 | length 429.6
  Top Layer w10: R22.2@171,1212 171,1185.37 297,1059.37 297,993.37 382.7,907.68 416.36,907.68 U2.27
NetR23_1: R23.1 U2.44 | length 102
  Top Layer w12: U2.44 550.05,501.95 R23.1@569,483
NetR24_2: R24.2 U2.25 | length 375.9
  Top Layer w10: R24.2 223,1156 313,1066 313,1000 369,944 U2.25@417,944
NetR25_1: R25.1 T15.0 U4.12 | length 414.6
  Top Layer w12: U4.12 R25.1@1558.47,1659 ; R25.1 1572.47,1685.47 1590.7,1703.7 1716.3,1703.7 T15.0
NetR26_1: R26.1 T17.0 U4.4 | length 295
  Top Layer w12: v1(1188,1325) 1212,1325 T17.0 ; v1(1188,1408) 1157,1439 R26.1 U4.4@1211.53,1509
  Bottom Layer w12: v1(1188,1325) v1(1188,1408)
NetR26_2: R26.2 R27.2 U3.5 | length 598
  Top Layer w12: U3.5 716,1572 785,1503 785,1451 830,1406 1049.47,1406 R26.2 ; R26.2@1082.47,1450.95 R27.2
NetR28_2: R28.2 U2.1 | length 73.1
  Top Layer w12: U2.1 R28.2@865.01,1167.99
NetR30_1: R30.1 T18.0 U4.13 | length 523.9
  Top Layer w12: R30.1@1437,1790.53 U4.13 1439.86,1721.7 1758.3,1721.7 T18.0
NetR31_1: R31.1 T19.0 U4.9 | length 420.1
  Top Layer w12: U4.9 1544.84,1461 R31.1 1572.47,1478.47 v1(1590,1496) ; v1(1812,1471) 1834,1471 T19.0
  Bottom Layer w12: v1(1590,1496) 1622.35,1496 1630.85,1487.5 1651.15,1487.5 1657.65,1494 1789,1494 v1(1812,1471)
NetR31_2: R31.2 R32.2 U3.10 | length 1064
  Top Layer w12: U3.10 933,1572 ; v1(914,1553) 933,1572 ; R32.2 937,1576 933,1572 ; v1(961,1379) 1314.35,1379 1326.85,1366.5 1347.15,1366.5 1376.65,1396 1398,1396 ; 1397,1395 1398,1396 ; R31.2 1631.53,1425.53 1483.63,1425.53 1454.1,1396 1398,1396
  Bottom Layer w12: v1(914,1553) 961,1506 v1(961,1379)
NetR35_2: R35.2 U5.3 | length 93.6
  Top Layer w12: R35.2@349,116 R35.2 U5.3
NetR36_2: R36.2 U6.3 | length 89.6
  Top Layer w12: R36.2@530,120 U6.3
PWR_EN: P2.10 U2.67 | length 1340.9
  Top Layer w10: v6(633,375) 633,184 802.08,14.92 1019.92,14.92 1025,20 P2.10 ; v1(779,375) 796,392 v1(796,494) ; v1(835,650) 835,720 882,767 U2.67@938,767
  Bottom Layer w10: v6(633,375) v1(779,375) ; v1(796,494) 789,501 789,604 v1(835,650)
SCK: P1.5 P2.6 U2.37 | length 1506.8
  Top Layer w10: v2(290,153) 264,179 264,601 371,708 U2.37@419,708 ; P2.6 v1(925,119)
  Bottom Layer w10: v2@288.5,153.5 366,76 581,76 643,14 914,14 925,25 P1.5 v1(925,119) v1@925,119.23
SS: R1.2 R2.2 R3.2 R4.2 R5.2 R6.2 R7.2 R8.2 U2.31 | length 1114.3
  Top Layer w10: U2.31@417,827 497,827 545,779 v2(545,761) ; v2(672,511) 672,449 750,371 750,353 765,338 798.47,338 R1.2 ; R1.2@812.53,365.53 R1.2 ; R8.2 R7.2 R6.2 R5.2 R4.2 R3.2 R2.2 R1.2
  Bottom Layer w10: v2@544,761 544,639 v2(672,511)
T\R\S\T: P3.4 R9.2 U2.10 | length 1068.5
  Top Layer w12: U2.10 689.62,1093.08 689.62,1058.9 735.52,1013 788,1013 815.91,1040.91 1262.09,1040.91 1310,993 P3.4@1645,993 ; P3.4@1626,989 P3.4@1652,989
TCK: P3.6 U2.57 | length 1334.4
  Top Layer w12: U2.57 805.95,528.14 845.09,489 1383,489 1575,681 1743.46,681 1894.73,832.27 1897,830 P3.6@1932,830
TDI: P3.1 U2.59 | length 940.8
  Top Layer w12: U2.59 845.32,539.68 860,525 1205,525 1285,605 1405,605 1551,751 P3.1@1649,751
TDO: P3.7 R10.1 U2.58 | length 1354.4
  Top Layer w12: U2.58 827.32,575.46 827.32,532.22 852.54,507 1261,507 1335,581 1449.54,581 1567.54,699 1736,699 1857,820 1857,869 1898,910 P3.7@1930,910
TMS: P3.2 U2.60 | length 917.4
  Top Layer w12: U2.60 899.15,543 1195,543 1275,623 1387,623 1595,831 P3.2@1649,831
VBAT: D1.1 P1.13 P2.14 | length 251.8
  Top Layer w35: v3(1106,131) 1125,112 P2.14 ; v4(1397,36) D1.1@1397,97.47
  Bottom Layer w35: v3(1106,131) 1124,113 P1.13@1124,65
  Bottom Layer w40: 1125,22 P1.13
VBAT_D: C2.1 C3.1 D1.2 D2.1 D3.1 U1.1 Vbat.0 | length 2348.4
  Top Layer w12: D2.1 470.53,57.47 503,25 573,25 D3.1@604,56
  Top Layer w20: D3.1@606,56 v2(670,56) ; v2(1391,295) 1394,298 D1.2
  Top Layer w30: U1.1@1717,327 1780.53,390.53 C3.1 ; C3.1@1782,439 1782,505 1874,597 Vbat.0
  Top Layer w35: D1.2 1453.47,219 1674,219 1717,262 1717,327 U1.1@1717,337 ; 1719.94,272.94 C2.1
  Bottom Layer w20: v2(670,56) 696,56 719,79 719,298 729.5,308.5 769.81,308.5 783.31,295 v2(1391,295)
VREF/2: R19.1 R27.1 R32.1 T21.0 U3.13 U3.14 | length 616
  Top Layer w12: U3.13 888,1722 907,1703 907,1700 ; U3.14 R19.1@942.53,1772 ; R19.1 945,1736 ; T21.0 945,1736 ; R32.1@1007,1576 1010,1579 1010,1583 907,1686 907,1700 ; R32.1 1101.53,1576 R27.1 ; 907,1700 909,1700 945,1736
pads on no net: P1.9 P1.11 P2.0 P2.12 P3.3 Q1.3 Q1.4 Q1.5 Q2.3 Q2.4 Q2.5 U2.2 U2.3 U2.4 U2.5 U2.6 U2.9 U2.19 U2.32 U2.33 U2.34 U2.38 U2.43 U2.45 U2.46 U2.48 U2.49 U2.50 U2.51 U2.55 U2.56 U2.61 U2.62 U2.64 U2.65 U2.68 U2.69 U2.75 U2.76 U2.77 U2.78 U2.79 U2.80 U4.2 U4.7 U4.15
copper on no net: | length 1311.8
  Top Layer w8: 41,521 41,1075.84 142,1075.84 ; 42,521 143,521 143,1076

## Polygon pours and split planes (outlines as drawn)
DGND on Bottom Layer "DGND" (solid, pour order 1001): 1,1352 1717,1350 1724,578 1727,1 0,0
AGND on Bottom Layer "AGND" (solid, pour order 1000): 2000,0 1425,1 1444,213 1557,304 1557,669 1395,996 1035,997 881,1308 721,1308 721,853 -1,853 0,2000 2000,2000
3.3V on Top Layer "3.3V pour" (solid, remove dead copper, pour order 1002): 0,2000 2000,2000 2000,0 0,0

## Other copper
Top Layer:
  text "IMU_CPU.2" at 213,635 h40 r90
  text "Falcon FC" at 123,546 h60 r90
Bottom Layer:
  rectangle net VBAT: 1104.43,3 1305,20.92
  rectangle net VBAT: 1209,3 1427,86

## Silkscreen, mask and mechanical layers (free items; w line width, h text height)
Top Solder:
  lines w8: 41,521 41,1075.84 142,1075.84 ; 42,521 143,521 143,1076
  text "IMU_CPU.2" at 213,635 h40 r90
  text "Falcon FC" at 123,546 h60 r90